# Altium PCB modFOC_ESC.PcbDoc (part 3 of 3)
Units mm, origin at the board's own origin, x right, y up, seen from the top; angles counter-clockwise.
Board outline 99.06 x 55.88 mm, 4 copper layers (Top Layer, Mid Layer 1, Mid Layer 2, Bottom Layer), stack 1.531 mm thick; 183 components, 125 nets, 799 pads, 484 vias.
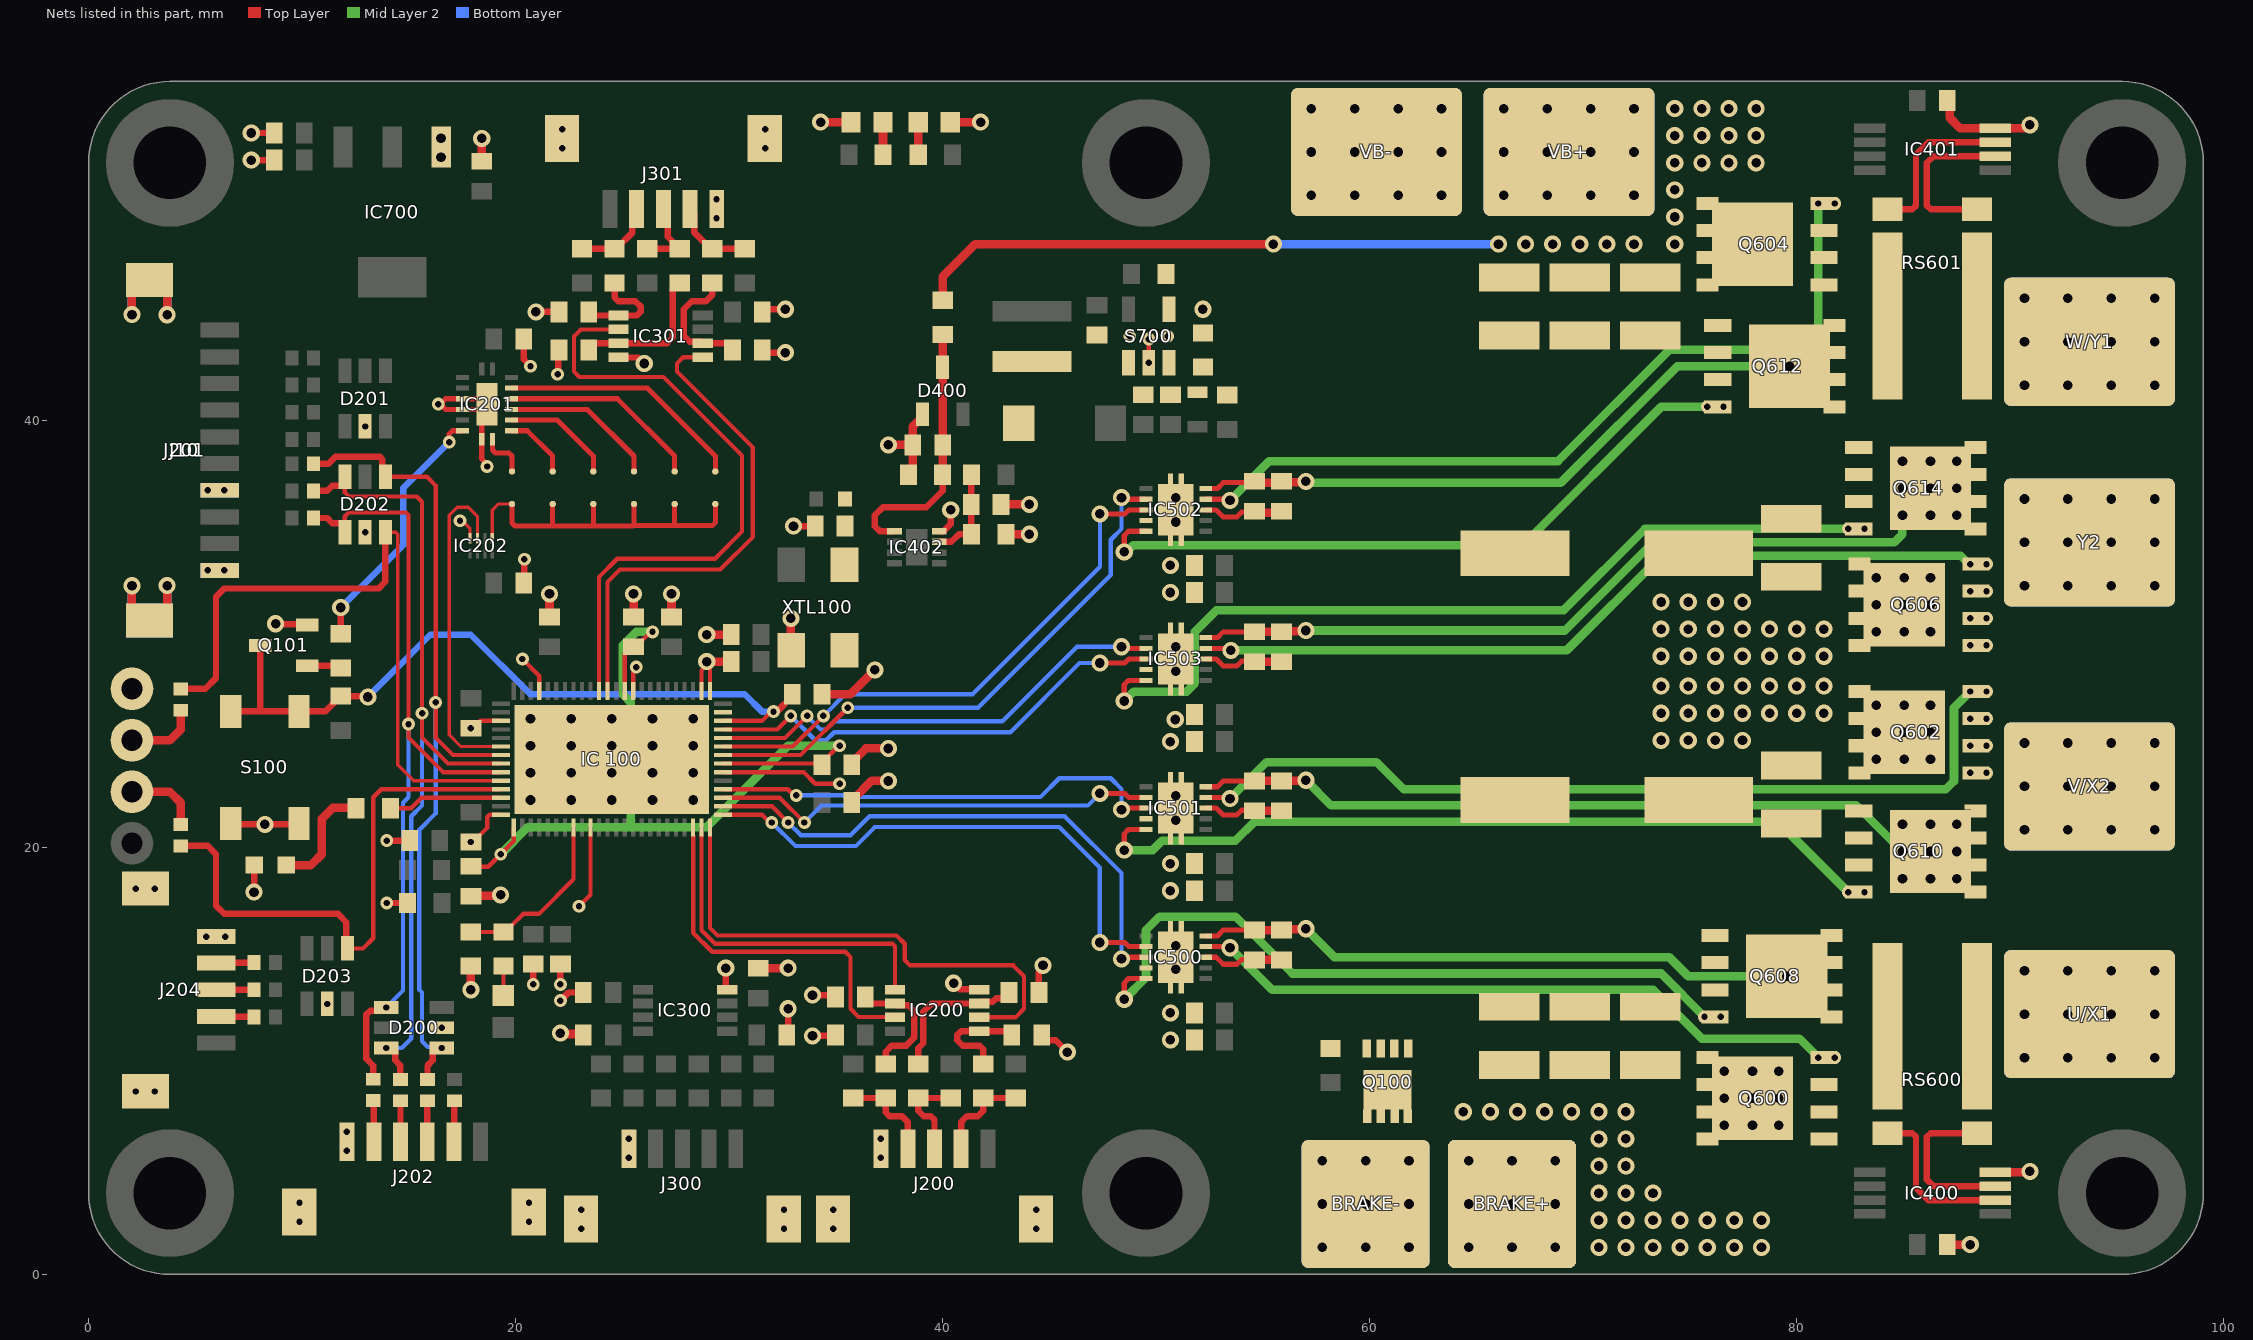
[diagram p4: the nets of this part, all layers, seen from the top]

## Via types
v1: diameter 0.8, hole 0.45, Top Layer to Bottom Layer, tented both sides, 308 vias
v2: diameter 0.6, hole 0.3, Top Layer to Bottom Layer, tented both sides, 176 vias

## Nets (pads, with @x,y where several pads share a name; then routed paths per layer and width w, separated by ;. In a path a pad name is that pad's centre, name@x,y a point inside that pad or via, vN(x,y) a via of type N, cw(c..) or ccw(c..) an arc to the next point about the centre after c; other vN are vias at no path point) (continued)
ENC2.B: "IC 100.65" IC301.5 | length 23.7
  Top Layer w0.2: 24.311,27.33 24.311,32.439 24.892,33.02 29.591,33.02 31.115,34.544 31.115,38.735 27.559,42.291 27.559,42.672 27.854,42.967 IC301.5@28.772,42.967
ENC2.N: "IC 100.66" IC301.2 | length 29.9
  Top Layer w0.2: 23.911,27.33 23.911,32.674 24.765,33.528 29.337,33.528 30.607,34.798 30.607,38.354 26.924,42.037 22.987,42.037 22.733,42.291 22.733,43.942 23.058,44.267 IC301.2@24.822,44.267
ENC2_A_5V: C307.1 IC301.1 R309.1 | length 5.1
  Top Layer w0.3: C307.1@23.368,45.185 23.368,45.085 23.536,44.917 IC301.1@24.822,44.917 25.681,44.917 25.857,45.093 25.857,45.341 25.605,45.593 24.814,45.593 24.638,45.769 R309.1@24.638,46.444
ENC2_A_IN: J301.4 R308.1 R309.2 | length 3.9
  Top Layer w0.3: R308.1@23.114,48.044 R309.2@24.638,48.044 24.713,48.044 25.474,48.805 25.474,49.705 J301.4@25.674,49.905
ENC2_B_5V: C306.1 IC301.3 R310.1 | length 6.9
  Top Layer w0.3: C306.1@23.433,43.307 23.433,43.327 23.723,43.617 IC301.3@24.822,43.617 27.107,43.617 27.361,43.871 27.361,46.194 27.611,46.444 R310.1@27.686,46.444
ENC2_B_IN: J301.3 R307.1 R310.2 | length 3.6
  Top Layer w0.3: R307.1@26.162,48.044 27.611,48.044 27.361,48.294 27.361,48.369 27.124,48.606 27.124,49.705 J301.3@26.924,49.905
ENC2_N_5V: C305.1 IC301.6 R311.1 | length 6.4
  Top Layer w0.3: R311.1@29.21,46.444 29.21,45.88 28.92,45.59 28.25,45.59 27.874,45.214 27.874,43.97 28.152,43.692 28.697,43.692 IC301.6@28.772,43.617 29.921,43.617 30.161,43.377 C305.1@30.161,43.307 ; C305.1@30.113,43.067 C305.1@30.353,43.307
ENC2_N_IN: J301.2 R306.1 R311.2 | length 3.9
  Top Layer w0.3: J301.2@28.174,49.905 28.374,49.705 28.374,48.805 29.135,48.044 R311.2@29.21,48.044 R306.1@30.734,48.044
GND: "IC 100.3" "IC 100.14" "IC 100.24" "IC 100.44" "IC 100.53" "IC 100.54" "IC 100.62" "IC 100.73" "IC 100.77" C100.1 C101.1 C102.1 C103.1 C104.1 C105.1 C106.1 C107.2 C108.1 C109.2 C110.2 C111.2 C112.2 C113.1 C200.1 C201.2 C202.2 C203.2 C204.2 C205.2 C300.1 C301.2 C302.2 C303.2 C304.1 C305.2 C306.2 C307.2 C401.1 C402.1 C404.1 C405.1 C406.1 C500.1 C501.1 C504.1 C505.1 C508.1 C509.1 C512.1 C513.1 C600.1 C602.1 C604.1 C606.1 C608.2 C609.2 C610.1 C611.1 C612.1 C613.1 C700.2 C701.2 C702.2 C708.2 C709.2 C710.2 D200.2 D201.2 D202.2 D203.2 D400.1 IC200.4 IC201.4 IC201.5 IC201.8 IC201.17 IC202.4 IC300.4 IC301.4 IC400.4 IC401.4 IC402.4 IC500.9 IC500.11 IC500.12 IC500.13 IC500.14 IC500.15 IC501.9 IC501.11 IC501.12 IC501.13 IC501.14 IC501.15 IC502.9 IC502.11 IC502.12 IC502.13 IC502.14 IC502.15 IC503.9 IC503.11 IC503.12 IC503.13 IC503.14 IC503.15 IC700.1 J10.1 J10.4 J10.MP1 J10.MP2 J200.1 J200.MP1 J200.MP2 J201.7 J201.10 J201.MP1 J201.MP2 J202.6 J202.MP1 J202.MP2 J204.1 J204.MP1 J204.MP2 J208.1 J300.1 J300.MP1 J300.MP2 J301.1 J301.MP1 J301.MP2 LED_Amber400.1 LED_Blue400.1 LED_Green400.1 Q100.1 Q100.2 Q100.3 Q101.2 Q608.1 Q608.2 Q608.3 Q610.1 Q610.2 Q610.3 Q612.1 Q612.2 Q612.3 Q614.1 Q614.2 Q614.3 R102.1 R403.1 R408.2 R410.1 R702.2 S100.1 S100.2 S700.2 VB-.1 XTL100.2 | length 115.5
  Top Layer w0.102: v1(7.747,17.907) v1@7.759,17.919
  Top Layer w0.15: v2(17.399,35.306) 17.518,35.306 17.863,34.961 IC202.4@17.863,34.486
  Top Layer w0.2: v2(17.907,20.255) 18.007,20.255 18.669,20.917 18.669,21.413 18.786,21.53 19.311,21.53 ; v2(17.907,25.589) 18.007,25.589 18.348,25.93 19.311,25.93 ; v2(20.32,28.829) 21.111,28.038 21.111,27.33 ; v2(22.97,17.246) 23.511,17.787 23.511,20.93 ; 25.511,27.33 25.511,28.197 25.654,28.34 v2(25.654,28.448) ; 28.711,27.33 28.711,28.295 28.956,28.54 v1(28.956,28.702) ; 29.111,27.33 v1@29.111,28.385 ; 29.711,23.53 33.493,23.53 34.036,22.987 v2(35.179,22.987) ; v2(49.657,42.704) v2(49.657,43.815)
  Top Layer w0.24: v2(16.383,40.767) v2@16.48,40.767 ; IC201.17@18.665,40.768 18.415,41.018 IC201.4@17.515,41.018 16.731,41.018 v2@16.48,40.767 ; v2(18.669,37.846) 18.669,37.943 18.415,38.197 IC201.8@18.415,39.118 18.415,40.518 IC201.5@17.515,40.518 16.729,40.518 v2@16.48,40.767
  Top Layer w0.3: S100.1@6.655,21.124 6.697,21.082 v1(8.255,21.082) 9.813,21.082 S100.2@9.855,21.124 ; v1(7.62,52.197) C701.2@8.698,52.197 ; v1(7.62,53.467) C700.2@8.698,53.467 ; v1@7.759,17.919 LED_Green400.1@7.759,19.177 ; v1(8.763,30.48) 8.796,30.447 10.211,30.447 Q101.2@10.244,30.414 ; v2(13.97,17.399) R410.1@14.948,17.399 ; v2(13.97,20.32) C406.1@15.048,20.32 ; C204.2@20.385,43.815 20.385,42.875 20.701,42.559 v2(20.701,42.545) ; C205.2@20.416,32.416 v2(20.416,33.497) ; v2(20.828,13.589) C106.1@20.828,14.54 ; v1(20.955,45.085) C307.2@22.033,45.085 ; v2(21.971,42.164) 22.002,42.195 22.002,43.276 C306.2@22.033,43.307 ; v2(22.098,12.827) 22.479,13.208 C301.2@23.176,13.208 ; v2(22.098,13.589) C107.2@22.098,14.54 ; IC301.4@24.822,42.967 24.837,42.952 25.747,42.952 v1(26.027,42.672) ; v1(29.845,14.351) 29.845,13.414 IC300.4@29.915,13.344 ; C305.2@31.561,43.307 31.688,43.18 v1(32.639,43.18) ; C304.1@31.561,45.085 31.688,45.212 v1(32.639,45.212) ; C303.2@32.704,11.226 32.766,11.288 v1(32.766,12.446) ; v1(33.02,35.052) C100.1@34.033,35.052 ; v1(33.909,11.176) 34.937,11.176 C200.1@34.987,11.226 ; v1(33.909,13.081) 34.91,13.081 C201.2@34.987,13.004 ; IC402.4@39.847,34.813 40.047,34.813 40.386,35.152 v1(40.386,35.814) ; v1(40.521,13.639) 40.801,13.359 41.711,13.359 IC200.4@41.726,13.344 ; C202.2@44.515,13.208 44.515,14.154 44.704,14.343 v1(44.704,14.478) ; C203.2@44.642,11.226 44.642,11.204 44.882,10.964 45.297,10.964 v1(45.847,10.414)
  Top Layer w0.4: v1(2.032,32.258) 2.032,31.233 2.632,30.633 J201.MP1@2.85,30.633 3.078,30.633 3.678,31.233 v1(3.678,32.262) ; v1(2.032,44.958) 2.032,45.983 2.632,46.583 J201.MP2@2.85,46.583 3.078,46.583 3.678,45.983 v1(3.678,44.954) ; v1(17.907,13.335) R102.1@17.907,14.44 ; C110.2@17.907,17.715 17.94,17.748 19.272,17.748 v1(19.304,17.78) ; C702.2@18.415,52.135 v1(18.415,53.213) ; C105.1@21.59,30.799 v1(21.59,31.877) ; v1(22.098,11.303) 22.136,11.265 23.137,11.265 C300.1@23.176,11.226 ; C112.2@25.527,30.799 v1(25.527,31.877) ; C104.1@27.305,30.799 v1(27.305,31.877) ; v1(28.956,28.702) C109.2@30.096,28.702 ; v1(28.956,29.972) C108.1@30.096,29.972 ; C302.2@31.369,14.339 31.375,14.345 32.76,14.345 v1(32.766,14.351) ; v1(32.893,30.734) 32.893,29.262 XTL100.2@32.913,29.242 ; v1(34.29,53.975) LED_Blue400.1@35.711,53.975 ; C113.1@34.355,27.178 35.687,27.178 v1(36.83,28.321) ; C103.1@35.752,22.098 35.752,22.198 36.686,23.132 37.447,23.132 v1(37.465,23.114) ; C111.2@35.752,23.876 35.752,23.976 36.414,24.638 v1(37.465,24.638) ; v1(37.465,38.862) C405.1@38.605,38.862 ; R408.2@38.405,37.465 38.605,37.665 C405.1@38.605,38.862 ; D400.1@39.055,40.302 39.055,40.052 38.955,39.952 38.839,39.952 38.605,39.718 C405.1@38.605,38.862 ; LED_Amber400.1@40.362,53.975 v1(41.783,53.975) ; C402.1@42.737,36.068 v1(44.069,36.068) ; R403.1@42.964,34.671 v1(44.069,34.671) ; C401.1@87.06,1.397 v1(88.138,1.397) ; C404.1@87.06,54.991 87.174,54.877 87.174,54.177 87.671,53.68 IC401.4@89.298,53.68 90.656,53.68 90.824,53.848 v1(90.932,53.848) ; IC400.4@89.298,4.785 90.891,4.785 v1(90.932,4.826)
  Bottom Layer w0.4: v1(2.032,32.258) 2.032,31.233 2.632,30.633 J10.MP2@2.85,30.633 3.078,30.633 3.678,31.233 v1(3.678,32.262) ; v1(2.032,44.958) 2.032,45.983 2.632,46.583 J10.MP1@2.85,46.583 3.078,46.583 3.678,45.983 v1(3.678,44.954)
  other v1: 50.67,10.987 50.67,12.257 50.924,14.289 50.924,15.402 50.67,17.972 50.67,19.242 50.924,21.274 20.701,22.225 22.606,22.225 24.511,22.225 26.416,22.225 28.321,22.225 50.924,22.417 20.701,23.495 22.606,23.495 24.511,23.495 26.416,23.495 28.321,23.495 20.701,24.765 22.606,24.765 24.511,24.765 26.416,24.765 28.321,24.765 50.67,24.957 50.901,25.996 20.701,26.035 22.606,26.035 24.511,26.035 26.416,26.035 28.321,26.035 50.924,28.259 50.924,29.402 50.67,31.942 50.67,33.212 50.924,35.244 50.924,36.387 52.197,45.212 16.51,52.324 16.51,53.213
  other v2: 23.076,2.141 32.576,2.141 34.887,2.141 44.387,2.141 9.878,2.464 20.628,2.464 23.076,3.03 32.576,3.03 34.887,3.03 44.387,3.03 9.878,3.353 20.628,3.353 25.3,5.466 37.111,5.466 12.102,5.789 25.3,6.355 37.111,6.355 12.102,6.678 2.218,8.572 3.107,8.572 16.54,11.557 11.176,12.67 5.518,15.822 6.407,15.822 2.218,18.072 3.107,18.072 5.588,32.983 6.35,32.983 12.954,34.768 5.588,36.733 6.35,36.733 12.954,39.721 48.768,43.942 50.546,43.942 29.411,49.473 29.411,50.362 22.187,52.748 31.687,52.748 22.187,53.637 31.687,53.637
H_BRDG_CNTRL.Gate_UX1_H: IC500.4 Q600.4 | length 31.6
  Top Layer w0.24: IC500.4@52.327,15.359 53.41,15.359 v1(53.464,15.305)
  Mid Layer 2 w0.4: v1(53.464,15.305) 55.434,13.335 73.279,13.335 75.565,11.049 80.137,11.049 v2(81.026,10.16) v2(81.788,10.16)
H_BRDG_CNTRL.Gate_UX1_L: IC500.10 Q608.4 | length 34.7
  Top Layer w0.24: v1(48.511,12.892) 48.511,13.654 48.716,13.859 IC500.10@49.527,13.859
  Mid Layer 2 w0.4: v1(48.511,12.892) 49.53,13.911 49.53,16.129 50.165,16.764 53.721,16.764 56.388,14.097 73.66,14.097 v2(75.692,12.065) v2(76.454,12.065)
H_BRDG_CNTRL.Gate_VX2_H: IC501.4 Q602.4 | length 41.7
  Top Layer w0.24: IC501.4@52.327,22.344 53.41,22.344 v1(53.464,22.29)
  Mid Layer 2 w0.4: v1(53.464,22.29) 55.177,24.003 60.325,24.003 61.595,22.733 86.995,22.733 87.376,23.114 87.376,26.543 v2(88.138,27.305) v2(88.9,27.305)
H_BRDG_CNTRL.Gate_VX2_L: IC501.10 Q610.4 | length 38.5
  Top Layer w0.24: v1(48.511,19.877) 48.511,20.639 48.716,20.844 IC501.10@49.527,20.844
  Mid Layer 2 w0.4: v1(48.511,19.877) 49.849,19.877 50.292,20.32 53.721,20.32 54.61,21.209 79.121,21.209 v2(82.423,17.907) v2(83.185,17.907)
H_BRDG_CNTRL.Gate_WY1_H: IC502.4 Q604.4 | length 39
  Top Layer w0.24: IC502.4@52.327,36.314 53.41,36.314 v1(53.464,36.26)
  Mid Layer 2 w0.4: v1(53.464,36.26) 55.304,38.1 68.834,38.1 74.041,43.307 80.518,43.307 81.026,43.815 v2(81.026,50.165) v2(81.788,50.165)
H_BRDG_CNTRL.Gate_WY1_L: IC502.10 Q612.4 | length 32.7
  Top Layer w0.24: v1(48.511,33.847) 48.511,34.609 48.716,34.814 IC502.10@49.527,34.814
  Mid Layer 2 w0.4: v1(48.511,33.847) 48.619,33.847 48.935,34.163 67.183,34.163 73.66,40.64 v2(75.819,40.64) v2(76.581,40.64)
H_BRDG_CNTRL.Gate_Y2_H: IC503.4 Q606.4 | length 38.6
  Top Layer w0.24: IC503.4@52.327,29.329 53.41,29.329 v1(53.504,29.235)
  Mid Layer 2 w0.4: v1(53.504,29.235) 69.24,29.235 73.66,33.655 87.703,33.655 88.084,33.274 v2(88.9,33.274)
  other v2: 88.138,33.274
H_BRDG_CNTRL.Gate_Y2_L: IC503.10 Q614.4 | length 41.3
  Top Layer w0.24: v1(48.511,26.862) 48.511,27.624 48.716,27.829 IC503.10@49.527,27.829
  Mid Layer 2 w0.4: v1(48.511,26.862) 48.954,27.305 51.435,27.305 51.816,27.686 51.816,30.099 52.832,31.115 69.088,31.115 72.898,34.925 v2(82.423,34.925) v2(83.185,34.925)
H_BRDG_CNTRL.Source_UX1_H: C502.1 C503.1 IC500.5 Q600.1 Q600.2 Q600.3 Q608.5 Q608.6 Q608.7 Q608.8 Q608.9 Q608.10 Q608.11 RS600.3 | length 28.3
  Top Layer w0.24: IC500.5@52.327,15.859 52.875,15.859 53.148,16.132 C503.1@54.607,16.132
  Top Layer w0.4: C503.1@54.607,16.132 C502.1@55.877,16.132 55.908,16.163 56.989,16.163 v1(57.02,16.194)
  Mid Layer 2 w0.4: v1(57.02,16.194) 58.355,14.859 74.041,14.859 74.93,13.97 v1(79.544,13.97)
H_BRDG_CNTRL.Source_VX2_H: C506.1 C507.1 IC501.5 Q602.1 Q602.2 Q602.3 Q610.5 Q610.6 Q610.7 Q610.8 Q610.9 Q610.10 Q610.11 V/X2.1 | length 34.2
  Top Layer w0.24: IC501.5@52.327,22.844 52.875,22.844 53.148,23.117 C506.1@54.607,23.117
  Top Layer w0.4: C506.1@54.607,23.117 C507.1@55.877,23.117 55.893,23.133 57.004,23.133 v1(57.02,23.149)
  Mid Layer 2 w0.4: v1(57.02,23.149) 58.198,21.971 82.804,21.971 v1(84.963,19.812) ; V/X2.1@90.6,22.86 V/X2.1@90.678,22.86
  other v1: 84.963,18.542 86.275,18.542 87.503,18.542 86.275,19.812 87.503,19.812 84.963,21.082 86.275,21.082 87.503,21.082
  other v2: 88.138,23.495 88.9,23.495 88.138,24.765 88.9,24.765 88.138,26.035 88.9,26.035
H_BRDG_CNTRL.Source_WY1_H: C510.1 C511.1 IC502.5 Q604.1 Q604.2 Q604.3 Q612.5 Q612.6 Q612.7 Q612.8 Q612.9 Q612.10 Q612.11 RS601.2 | length 29.8
  Top Layer w0.24: IC502.5@52.327,36.814 52.875,36.814 53.148,37.087 C510.1@54.607,37.087
  Top Layer w0.4: C510.1@54.607,37.087 55.877,37.087 55.908,37.118 56.989,37.118 v1(57.02,37.149)
  Mid Layer 2 w0.4: v1(57.02,37.149) 57.085,37.084 68.961,37.084 74.422,42.545 v1(79.671,42.545)
H_BRDG_CNTRL.Source_Y2_H: C514.1 C515.1 IC503.5 Q606.1 Q606.2 Q606.3 Q614.5 Q614.6 Q614.7 Q614.8 Q614.9 Q614.10 Q614.11 Y2.1 | length 35.5
  Top Layer w0.24: IC503.5@52.327,29.829 52.875,29.829 53.148,30.102 C514.1@54.607,30.102
  Top Layer w0.4: C514.1@54.607,30.102 C515.1@55.877,30.102 55.908,30.133 56.989,30.133 v1(57.02,30.164)
  Mid Layer 2 w0.4: v1(57.02,30.164) 69.153,30.164 73.279,34.29 84.582,34.29 84.963,34.671 v1(84.963,35.56)
  other v1: 86.275,35.56 87.503,35.56 84.963,36.83 86.275,36.83 87.503,36.83 84.963,38.1 86.275,38.1 87.503,38.1
  other v2: 88.138,29.464 88.9,29.464 88.138,30.734 88.9,30.734 88.138,32.004 88.9,32.004
HALL.UX: "IC 100.38" IC200.2 | length 24.6
  Top Layer w0.2: 29.111,20.93 29.111,16.228 29.464,15.875 37.846,15.875 38.227,15.494 38.227,14.732 38.481,14.478 43.307,14.478 43.815,13.97 43.815,12.446 43.413,12.044 IC200.2@41.726,12.044
HALL.V: "IC 100.37" IC200.5 | length 16.2
  Top Layer w0.2: 28.711,20.93 28.711,16.12 29.337,15.494 37.659,15.494 37.776,15.377 IC200.5@37.776,13.344
HALL.WY: "IC 100.36" IC200.7 | length 17.4
  Top Layer w0.2: 28.311,20.93 28.311,20.546 28.321,20.536 28.321,16.002 29.21,15.113 35.443,15.113 35.687,14.869 35.687,12.446 36.068,12.065 37.755,12.065 IC200.7@37.776,12.044
HALL_U_5V: C201.1 IC200.6 R205.1 | length 6
  Top Layer w0.3: C201.1@36.387,13.004 36.387,12.934 36.627,12.694 IC200.6@37.776,12.694 37.851,12.619 38.396,12.619 38.674,12.341 38.674,11.097 38.298,10.721 37.628,10.721 37.338,10.431 R205.1@37.338,9.867
HALL_U_IN: J200.2 R200.1 R205.2 | length 4.7
  Top Layer w0.3: R200.1@35.814,8.267 R205.2@37.338,8.267 37.338,7.592 37.514,7.416 38.1,7.416 38.374,7.142 J200.2@38.374,5.898
HALL_V_5V: C202.1 IC200.3 R204.1 | length 6.9
  Top Layer w0.3: R204.1@38.862,9.867 38.862,10.591 39.101,10.83 39.101,12.304 39.491,12.694 IC200.3@41.726,12.694 41.801,12.769 42.346,12.769 42.516,12.939 C202.1@43.18,12.939
HALL_V_IN: J200.3 R201.1 R204.2 | length 4.4
  Top Layer w0.3: J200.3@39.624,5.898 39.624,7.24 39.448,7.416 39.116,7.416 38.862,7.67 R204.2@38.862,8.267 R201.1@40.386,8.267
HALL_W_5V: C203.1 IC200.1 R203.1 | length 5.1
  Top Layer w0.3: R203.1@41.91,9.867 41.91,10.542 41.734,10.718 40.943,10.718 40.691,10.97 40.691,11.218 40.867,11.394 43.012,11.394 43.18,11.226 C203.1@43.18,11.126
HALL_W_IN: J200.4 R202.1 R203.2 | length 4.6
  Top Layer w0.3: J200.4@40.874,5.898 40.874,7.142 41.02,7.288 41.148,7.416 41.656,7.416 41.91,7.67 R203.2@41.91,8.267 R202.1@43.434,8.267
NetBRAKE-_1: BRAKE-.1 Q100.5 Q100.6 Q100.7 Q100.8 Q100.9
NetC100_2: C100.2 L100.2 XTL100.4
NetC402_2: C402.2 IC402.3 R401.1 R403.2 | length 4.5
  Top Layer w0.3: IC402.3@39.847,34.313 40.409,34.313 40.767,34.671 R403.2@41.364,34.671 41.35,34.685 41.35,36.054 C402.2@41.337,36.068 41.35,36.082 41.35,37.451 R401.1@41.364,37.465
NetC405_2: C405.2 D400.3 IC402.5 R407.2 R408.1 | length 12.5
  Top Layer w0.3: IC402.5@37.747,34.813 37.069,34.813 36.83,35.052 36.83,35.56 37.211,35.941 39.243,35.941 40.005,36.703 R408.1@40.005,37.465
  Top Layer w0.4: R408.1@40.005,37.465 C405.2@40.005,38.862 D400.3@40.005,42.502 R407.2@40.005,44.031
NetC502_2: C502.2 C503.2 IC500.3 | length 5.7
  Top Layer w0.24: C503.2@54.607,14.732 54.581,14.758 54.011,14.758 ; 52.815,14.859 53.143,14.531 ; 52.815,14.859 53.143,14.531 ; 52.815,14.859 IC500.3@52.327,14.859 52.815,14.859 ; 53.143,14.531 53.785,14.531 ; 53.143,14.531 53.785,14.531 ; 53.785,14.531 54.011,14.758 ; 53.785,14.531 54.011,14.758
  Top Layer w0.4: C503.2@54.607,14.732 C502.2@55.877,14.732
NetC506_2: C506.2 C507.2 IC501.3 | length 5.7
  Top Layer w0.24: C506.2@54.607,21.717 54.581,21.743 54.011,21.743 ; 52.815,21.844 IC501.3@52.327,21.844 52.815,21.844 ; 52.815,21.844 53.143,21.516 ; 52.815,21.844 53.143,21.516 ; 53.143,21.516 53.785,21.516 ; 53.143,21.516 53.785,21.516 ; 53.785,21.516 54.011,21.743 ; 53.785,21.516 54.011,21.743
  Top Layer w0.4: C506.2@54.607,21.717 C507.2@55.877,21.717
NetC510_2: C510.2 C511.2 IC502.3 | length 5.7
  Top Layer w0.24: C510.2@54.607,35.687 54.581,35.713 54.011,35.713 ; 52.815,35.814 IC502.3@52.327,35.814 52.815,35.814 ; 52.815,35.814 53.143,35.486 ; 52.815,35.814 53.143,35.486 ; 53.143,35.486 53.785,35.486 ; 53.143,35.486 53.785,35.486 ; 53.785,35.486 54.011,35.713 ; 53.785,35.486 54.011,35.713
  Top Layer w0.4: C510.2@54.607,35.687 C511.2@55.877,35.687
NetC514_2: C514.2 C515.2 IC503.3 | length 3.8
  Top Layer w0.24: IC503.3@52.327,28.829 52.815,28.829 53.143,28.501 53.785,28.501 54.011,28.728 54.581,28.728 C514.2@54.607,28.702
  Top Layer w0.4: C514.2@54.607,28.702 C515.2@55.877,28.702
NetC704_2: C704.2 R701.2 R702.1 S700.3
NetD700_2: D700.2 L700.2 S700.1
NetIC201_9: IC201.9 SB205.2 | length 2.3
  Top Layer w0.24: IC201.9@18.915,39.118 18.915,38.622 19.056,38.481 19.685,38.481 19.833,38.333 SB205.2@19.833,37.613
NetIC201_10: IC201.10 SB204.2 | length 3.1
  Top Layer w0.24: IC201.10@19.815,39.518 20.553,39.518 21.738,38.333 SB204.2@21.738,37.613
NetIC201_11: IC201.11 SB203.2 | length 5.2
  Top Layer w0.24: IC201.11@19.815,40.018 21.958,40.018 23.643,38.333 SB203.2@23.643,37.613
NetIC201_12: IC201.12 SB202.2 | length 7.4
  Top Layer w0.24: IC201.12@19.815,40.518 23.363,40.518 25.548,38.333 SB202.2@25.548,37.613
NetIC201_13: IC201.13 SB201.2 | length 9.5
  Top Layer w0.24: IC201.13@19.815,41.018 24.768,41.018 27.453,38.333 SB201.2@27.453,37.613
NetIC201_14: IC201.14 SB200.2 | length 11.6
  Top Layer w0.24: IC201.14@19.815,41.518 26.173,41.518 29.358,38.333 SB200.2@29.358,37.613
NetIC202_1: IC202.1 SB200.1 SB201.1 SB202.1 SB203.1 SB204.1 SB205.1 | length 17.9
  Top Layer w0.15: IC202.1@18.913,34.486 18.913,35.804 19.198,36.089 SB205.1@19.833,36.089
  Top Layer w0.24: SB205.1@19.833,36.089 19.833,35.193 19.974,35.052 21.717,35.052 ; SB204.1@21.738,36.089 21.738,35.073 21.717,35.052 ; SB203.1@23.643,36.089 23.643,35.073 23.622,35.052 ; SB202.1@25.548,36.089 25.548,35.073 ; SB201.1@27.453,36.089 27.453,35.073 ; SB200.1@29.358,36.089 29.358,35.214 29.217,35.073 27.453,35.073 ; 21.717,35.052 23.622,35.052 ; 23.622,35.052 25.527,35.052 25.548,35.073 ; 25.548,35.073 27.453,35.073
"NetIC 100_22": "IC 100.22" R100.1 R102.2 | length 8.2
  Top Layer w0.2: R102.2@17.907,16.04 19.506,16.04 19.806,16.34 20.357,16.891 21.091,16.891 22.711,18.511 22.711,20.93
"NetIC 100_51": "IC 100.51" XTL100.3
NetJ202_2: J202.2 R206.1 | length 1.9
  Top Layer w0.3: J202.2@17.115,6.221 17.13,6.236 17.13,8.121 R206.1@17.145,8.136
NetJ202_3: J202.3 R207.1 | length 1.9
  Top Layer w0.3: J202.3@15.865,6.221 15.87,6.226 15.87,8.131 R207.1@15.875,8.136
NetJ202_4: J202.4 R208.1 | length 1.9
  Top Layer w0.3: R208.1@14.605,8.136 14.61,8.131 14.61,6.226 J202.4@14.615,6.221
NetJ202_5: J202.5 R209.1 | length 1.9
  Top Layer w0.3: R209.1@13.335,8.144 13.35,8.129 13.35,6.236 J202.5@13.365,6.221
NetJ204_2: J204.2 R219.1 | length 1.8
  Top Layer w0.3: J204.2@5.975,14.585 5.985,14.595 7.745,14.595 R219.1@7.755,14.605
NetJ204_3: J204.3 R218.1 | length 1.8
  Top Layer w0.3: J204.3@5.975,13.335 R218.1@7.755,13.335
NetJ204_4: J204.4 R217.1 | length 1.8
  Top Layer w0.3: J204.4@5.975,12.085 5.985,12.075 7.745,12.075 R217.1@7.755,12.065
NetJ206_1: J206.1 R220.1 | length 3.4
  Top Layer w0.4: J206.1@2.032,25.019 3.81,25.019 4.318,25.527 R220.1@4.318,26.424
NetJ207_1: J207.1 R221.1 | length 3.4
  Top Layer w0.4: J207.1@2.032,22.606 3.81,22.606 4.318,22.098 R221.1@4.318,21.201
NetLED_Amber400_2: LED_Amber400.2 R404.2 | length 1.7
  Top Layer w0.3: LED_Amber400.2@38.862,53.848 38.989,53.975 LED_Amber400.2@38.862,53.975
  Top Layer w0.4: R404.2@38.862,52.451 LED_Amber400.2@38.862,53.848
NetLED_Blue400_2: LED_Blue400.2 R405.2 | length 1.5
  Top Layer w0.4: R405.2@37.211,52.451 LED_Blue400.2@37.211,53.975
NetLED_Green400_2: LED_Green400.2 R406.2 | length 5.4
  Top Layer w0.4: LED_Green400.2@9.259,19.177 10.414,19.177 10.922,19.685 10.922,21.336 11.44,21.854 12.525,21.854 R406.2@12.535,21.844
NetQ100_4: Q100.4 R101.2
NetQ101_1: Q101.1 R104.1 | length 1.6
  Top Layer w0.3: Q101.1@10.244,28.514 11.707,28.514 R104.1@11.811,28.41
NetR100_2: R100.2 RT100.2 | length 1.4
  Top Layer w0.2: RT100.2@19.431,13.069 R100.2@19.431,14.44
NetR700_1: R700.1 S700.4
NetRS600_2: RS600.2 U/X1.1
NetRS601_3: RS601.3 W/Y1.1
PWM_Out.PWM_UX1_H: "IC 100.39" IC500.7 | length 25.2
  Top Layer w0.2: 29.711,21.53 31.537,21.53 31.896,21.171 v2(32.004,21.171)
  Top Layer w0.24: v1(47.368,15.548) 48.537,15.548 48.726,15.359 IC500.7@49.527,15.359
  Bottom Layer w0.2: v2(32.004,21.171) 33.109,20.066 35.941,20.066 36.83,20.955 45.466,20.955 47.368,19.053 v1(47.368,15.548)
PWM_Out.PWM_UX1_L: "IC 100.40" IC500.8 | length 25.9
  Top Layer w0.2: 29.711,21.93 32.007,21.93 v2(32.766,21.171)
  Top Layer w0.24: v1(48.384,14.786) 48.457,14.859 IC500.8@49.527,14.859
  Bottom Layer w0.2: v2(32.766,21.171) 33.363,20.574 35.687,20.574 36.576,21.463 45.72,21.463 48.384,18.799 v1(48.384,14.786)
PWM_Out.PWM_VX2_H: "IC 100.41" IC501.7 | length 20.9
  Top Layer w0.2: 29.711,22.33 32.369,22.33 v2(33.528,21.171)
  Top Layer w0.24: v1(47.368,22.533) 48.537,22.533 48.726,22.344 IC501.7@49.527,22.344
  Bottom Layer w0.2: v2(33.528,21.171) 34.328,21.971 46.806,21.971 v1(47.368,22.533)
PWM_Out.PWM_VX2_L: "IC 100.42" IC501.8 | length 21.5
  Top Layer w0.2: 29.711,22.73 32.75,22.73 33.039,22.441 v2(33.147,22.441)
  Top Layer w0.24: v1(48.384,21.771) 48.457,21.844 IC501.8@49.527,21.844
  Bottom Layer w0.2: v2(33.147,22.441) 35.361,22.441 35.442,22.36 44.585,22.36 45.466,23.241 47.879,23.241 48.384,22.736 v1(48.384,21.771)
PWM_Out.PWM_WY1_H: "IC 100.46" IC502.7 | length 26.7
  Top Layer w0.2: 29.711,24.33 33.347,24.33 v2(35.56,26.543)
  Top Layer w0.24: v1(48.384,36.387) 48.457,36.314 IC502.7@49.527,36.314
  Bottom Layer w0.2: v2(35.56,26.543) 41.656,26.543 47.879,32.766 47.879,34.417 48.387,34.925 48.387,36.384 v1(48.384,36.387)
PWM_Out.PWM_WY1_L: "IC 100.47" IC502.8 | length 25.9
  Top Layer w0.2: 29.711,24.73 32.985,24.73 v2(34.417,26.162)
  Top Layer w0.24: v1(47.368,35.625) 48.537,35.625 48.726,35.814 IC502.8@49.527,35.814
  Bottom Layer w0.2: v2(34.417,26.162) 35.433,27.178 41.402,27.178 47.371,33.147 v1@47.371,35.625
PWM_Out.PWM_Y2_H: "IC 100.48" IC503.7 | length 22.1
  Top Layer w0.2: 29.711,25.13 32.623,25.13 v2(33.655,26.162)
  Top Layer w0.24: v1(48.384,29.402) 48.457,29.329 IC503.7@49.527,29.329
  Bottom Layer w0.2: v2(33.655,26.162) 34.29,25.527 34.544,25.527 34.925,25.908 42.799,25.908 46.293,29.402 v1(48.384,29.402)
PWM_Out.PWM_Y2_L: "IC 100.49" IC503.8 | length 22.1
  Top Layer w0.2: 29.711,25.53 32.261,25.53 v2(32.893,26.162)
  Top Layer w0.24: v1(47.368,28.64) 48.537,28.64 48.726,28.829 IC503.8@49.527,28.829
  Bottom Layer w0.2: v2(32.893,26.162) 34.036,25.019 34.544,25.019 34.925,25.4 43.18,25.4 46.42,28.64 v1(47.368,28.64)
RS1_neg: IC400.3 RS600.1 | length 7.7
  Top Layer w0.3: RS600.1@88.46,6.62 86.282,6.62 86.106,6.444 86.106,4.445 86.416,4.135 IC400.3@89.298,4.135
RS1_pos: IC400.2 RS600.4 | length 7.7
  Top Layer w0.3: RS600.4@84.26,6.62 85.422,6.62 85.598,6.444 85.598,4.064 86.177,3.485 IC400.2@89.298,3.485
RS2_neg: IC401.2 RS601.4 | length 7.7
  Top Layer w0.3: RS601.4@88.46,49.895 86.282,49.895 86.106,50.071 86.106,52.07 86.416,52.38 IC401.2@89.298,52.38
RS2_pos: IC401.3 RS601.1 | length 7.7
  Top Layer w0.3: RS601.1@84.26,49.895 85.422,49.895 85.598,50.071 85.598,52.451 86.177,53.03 IC401.3@89.298,53.03
SPI.MISO: "IC 100.9" D200.4 D202.1 R209.2 R216.1 | length 39.3
  Top Layer w0.2: D202.1@12.004,35.043 12.004,35.511 12.186,35.693 14.869,35.693 14.986,35.576 v2(14.986,25.781) 14.986,25.146 16.602,23.53 19.311,23.53 ; D200.4@13.94,12.642 D200.4@14.35,12.642
  Top Layer w0.3: R216.1@10.533,35.433 11.176,35.433 11.416,35.193 11.854,35.193 12.004,35.043 D202.1@12.004,34.768 ; R209.2@13.335,9.144 13.335,9.779 13.015,10.099 13.015,12.181 13.191,12.357 13.655,12.357 D200.4@13.94,12.642
  Bottom Layer w0.2: v2(13.94,12.507) 14.732,13.299 14.732,22.098 14.986,22.352 v2(14.986,25.781)
SPI.MOSI: "IC 100.8" D200.6 D202.6 R208.2 R215.1 | length 40.3
  Top Layer w0.2: D202.6@12.004,37.093 12.004,36.625 12.186,36.443 15.373,36.443 15.621,36.195 v2(15.621,26.289) 15.621,25.146 16.837,23.93 19.311,23.93
  Top Layer w0.24: D200.6@13.94,10.742 D200.6@14.365,10.742
  Top Layer w0.3: R215.1@10.533,36.703 11.176,36.703 11.416,36.943 11.854,36.943 12.004,37.093 D202.6@12.004,37.368 ; D200.6@14.215,10.615 14.365,10.465 14.365,10.027 14.605,9.787 R208.2@14.605,9.144
  Bottom Layer w0.2: v2(13.94,10.607) 14.671,10.607 15.113,11.049 15.113,21.463 15.621,21.971 v2(15.621,26.289)
SPI.NSCS: "IC 100.6" IC202.3 | length 15.6
  Top Layer w0.15: IC202.3@18.213,34.486 18.213,35.508 17.78,35.941 17.272,35.941 16.891,35.56 16.891,25.273 17.434,24.73 19.311,24.73
SPI.SCK: "IC 100.7" D200.1 D202.4 R207.2 R214.1 | length 41.4
  Top Layer w0.2: D202.4@13.904,37.368 15.845,37.368 16.256,36.957 v2(16.256,26.797) 16.256,25.146 17.072,24.33 19.311,24.33
  Top Layer w0.24: D200.1@16.115,10.742 D200.1@16.54,10.742
  Top Layer w0.3: R214.1@10.533,37.973 11.239,37.973 11.559,38.293 13.65,38.293 13.754,38.189 13.754,37.518 D202.4@13.904,37.368 ; R207.2@15.875,9.144 15.875,9.787 16.115,10.027 16.115,10.465 D200.1@16.265,10.615
  Bottom Layer w0.2: v2(16.256,26.797) 16.256,21.59 15.494,20.828 15.494,13.335 15.621,13.208 15.621,10.922 15.887,10.656 16.491,10.656 v2(16.54,10.607)
STATUS: "IC 100.12" R406.1 | length 5.4
  Top Layer w0.2: R406.1@14.135,21.844 15.113,21.844 15.599,22.33 19.311,22.33
TMC_NRST: "IC 100.50" C113.2 Q101.3 R103.1 S100.3 S100.4 | length 35.4
  Top Layer w0.2: 29.711,25.93 31.537,25.93 31.896,26.289 32.004,26.289 v2(32.081,26.366) ; C113.2@32.955,27.078 C113.2@32.955,27.178
  Top Layer w0.3: S100.4@6.655,26.374 S100.3@9.855,26.374 11.096,26.374 11.486,26.764 11.486,26.839 11.736,27.089 R103.1@11.811,27.089 13.043,27.089 v1(13.081,27.051) ; 8.044,26.416 Q101.3@8.044,29.464 ; v2(32.081,26.366) 32.243,26.366 C113.2@32.955,27.078
  Bottom Layer w0.3: v1(13.081,27.051) 16.002,29.972 17.907,29.972 20.701,27.178 30.734,27.178 31.546,26.366 v2(32.081,26.366)
TMC_RST: IC201.7 R104.2 | length 12.1
  Top Layer w0.24: v2(16.891,38.989) 16.891,39.37 17.039,39.518 IC201.7@17.515,39.518
  Top Layer w0.3: R104.2@11.811,30.01 v1(11.811,31.242)
  Bottom Layer w0.3: v1(11.811,31.242) 14.732,34.163 14.732,36.83 v2(16.891,38.989)
UART.RX: "IC 100.10" D202.3 R220.2 | length 32.8
  Top Layer w0.15: D202.3@13.904,34.768 14.39,34.768 14.478,34.68 14.478,23.876 15.224,23.13 19.311,23.13
  Top Layer w0.3: R220.2@4.326,27.432 5.461,27.432 5.969,27.94 5.969,31.75 6.35,32.131 13.589,32.131 13.904,32.446 D202.3@13.904,34.768
UART.TX: "IC 100.11" D203.4 R221.2 | length 26
  Top Layer w0.2: D203.4@12.126,15.27 12.857,15.27 13.335,15.748 13.335,22.352 13.713,22.73 19.311,22.73
  Top Layer w0.3: R221.2@4.318,20.074 5.58,20.074 5.969,19.685 5.969,17.272 6.35,16.891 11.684,16.891 12.075,16.5 12.075,15.321 D203.4@12.126,15.27
VB+: BRAKE+.1 C600.2 C602.2 C604.2 C606.2 C608.1 C609.1 C610.2 C611.2 C612.2 C613.2 Q600.5 Q600.6 Q600.7 Q600.8 Q600.9 Q600.10 Q600.11 Q602.5 Q602.6 Q602.7 Q602.8 Q602.9 Q602.10 Q602.11 Q604.5 Q604.6 Q604.7 Q604.8 Q604.9 Q604.10 Q604.11 Q606.5 Q606.6 Q606.7 Q606.8 Q606.9 Q606.10 Q606.11 R407.1 VB+.1 | length 27.8
  Top Layer w0.4: R407.1@40.005,45.631 40.005,46.736 41.529,48.26 v1(55.499,48.26)
  Bottom Layer w0.4: v1(55.499,48.26) v1(66.04,48.26)
  other v1: 70.739,1.27 72.009,1.27 73.279,1.27 74.549,1.27 75.819,1.27 77.089,1.27 78.359,1.27 70.739,2.54 72.009,2.54 73.279,2.54 74.549,2.54 75.819,2.54 77.089,2.54 78.359,2.54 70.739,3.81 72.009,3.81 73.279,3.81 70.739,5.08 72.009,5.08 70.739,6.35 72.009,6.35 76.624,6.985 77.936,6.985 79.164,6.985 64.389,7.62 65.659,7.62 66.929,7.62 68.199,7.62 69.469,7.62 70.739,7.62 72.009,7.62 76.624,8.255 77.936,8.255 79.164,8.255 76.624,9.525 77.936,9.525 79.164,9.525 83.736,24.13 85.048,24.13 86.276,24.13 73.66,25.019 74.93,25.019 76.2,25.019 77.47,25.019 83.736,25.4 85.048,25.4 86.276,25.4 73.66,26.289 74.93,26.289 76.2,26.289 77.47,26.289 78.74,26.289 80.01,26.289 81.28,26.289 83.736,26.67 85.048,26.67 86.276,26.67 73.66,27.559 74.93,27.559 76.2,27.559 77.47,27.559 78.74,27.559 80.01,27.559 81.28,27.559 73.66,28.956 74.93,28.956 76.2,28.956 77.47,28.956 78.74,28.956 80.01,28.956 81.28,28.956 83.736,30.099 85.048,30.099 86.276,30.099 73.66,30.226 74.93,30.226 76.2,30.226 77.47,30.226 78.74,30.226 80.01,30.226 81.28,30.226 83.736,31.369 85.048,31.369 86.276,31.369 73.66,31.496 74.93,31.496 76.2,31.496 77.47,31.496 83.736,32.639 85.048,32.639 86.276,32.639 67.31,48.26 68.58,48.26 69.85,48.26 71.12,48.26 72.39,48.26 74.295,48.26 74.295,49.53 74.295,50.8 74.295,52.07 75.565,52.07 76.835,52.07 78.105,52.07 74.295,53.34 75.565,53.34 76.835,53.34 78.105,53.34 74.295,54.61 75.565,54.61 76.835,54.61 78.105,54.61
VCORE: "IC 100.15" "IC 100.45" "IC 100.63" C110.1 C111.1 C112.1 | length 40.8
  Top Layer w0.2: C110.1@17.9,19.1 18.719,19.1 v2(19.304,19.685) 19.911,20.292 19.911,20.93 ; 25.111,27.33 25.111,29.083 25.427,29.399 C112.1@25.527,29.399 25.627,29.399 26.327,30.099 v2(26.416,30.099) ; 29.711,23.93 C111.1@34.306,23.93 ; C111.1@34.352,23.876 34.352,23.976 35.141,24.765 v2(35.179,24.765)
  Mid Layer 2 w0.4: v2(19.304,19.685) 20.574,20.955 25.4,20.955 ; v2(26.416,30.099) 25.654,30.099 25.027,29.472 25.027,27.17 25.4,26.797 25.4,20.955 ; v2(35.179,24.765) 32.766,24.765 28.956,20.955 25.4,20.955
pads on no net: "IC 100.1" "IC 100.4" "IC 100.5" "IC 100.21" "IC 100.32" "IC 100.56" "IC 100.57" "IC 100.58" "IC 100.59" "IC 100.60" "IC 100.67" "IC 100.68" "IC 100.69" "IC 100.71" "IC 100.74" "IC 100.75" "IC 100.76" IC201.15 IC400.1 IC401.1 IC402.9 IC500.2 IC501.2 IC502.2 IC503.2 XTL100.1

## Polygon pours and split planes (outlines as drawn)
"NetIC 100_51" on Top Layer "NETIC_100_51_L01_P073" (solid, pour order 73): 34.763,30.042 33.782,29.061 33.782,28.321 33.655,28.194 32.131,28.194 31.75,27.813 31.75,27.178 31.002,26.43 29.286,26.43 29.286,26.23 31.31,26.23 32.385,27.305 32.385,27.686 32.512,27.813 35.434,27.813 36.063,28.442 36.063,30.042
NetC100_2 on Top Layer "NETC100_2_L01_P072" (solid, pour order 72): 35.108,36.672 35.108,35.607 35.043,35.542 35.043,34.322 34.763,34.042 34.763,32.442 36.063,32.442 36.063,34.042 35.823,34.282 35.823,35.542 35.758,35.607 35.758,36.672
+2,5V_ref_camp on Top Layer "+2,5V_REF_CAMP_L01_P061" (solid, pour order 61): 84.16,52.155 84.16,53.255 81.449,53.255 81.28,53.086 81.28,52.324 81.449,52.155
+2,5V_ref_camp on Top Layer "+2,5V_REF_CAMP_L01_P060" (solid, pour order 60): 84.16,3.26 84.16,4.36 81.449,4.36 81.28,4.191 81.28,3.429 81.449,3.26
GND on Top Layer "GND_L01_P058" (solid, pour order 58): 50.102,13.659 50.102,13.964 49.827,14.239 49.227,14.239 49.227,14.479 49.827,14.479 50.102,14.754 50.102,16.059 50.552,16.059 50.552,16.559 50.802,16.559 50.802,16.059 51.052,16.059 51.052,16.559 51.302,16.559 51.302,16.059 51.752,16.059 51.752,13.659 51.752,12.747 52.194,12.747 52.194,10.497 50.102,10.497
GND on Top Layer "GND_L01_P057" (solid, pour order 57): 50.102,20.644 50.102,20.949 49.827,21.224 49.227,21.224 49.227,21.464 49.827,21.464 50.102,21.739 50.102,23.044 50.552,23.044 50.552,23.544 50.802,23.544 50.802,23.044 51.052,23.044 51.052,23.544 51.302,23.544 51.302,23.044 51.752,23.044 51.752,20.644 51.752,19.732 52.194,19.732 52.194,17.482 50.102,17.482
GND on Top Layer "GND_L01_P056" (solid, pour order 56): 50.102,27.629 50.102,27.934 49.827,28.209 49.227,28.209 49.227,28.449 49.827,28.449 50.102,28.724 50.102,30.029 50.552,30.029 50.552,30.529 50.802,30.529 50.802,30.029 51.052,30.029 51.052,30.529 51.302,30.529 51.302,30.029 51.752,30.029 51.752,27.629 51.752,26.717 52.194,26.717 52.194,24.467 50.102,24.467
+13V5 on Top Layer "+13V5_L01_P055" (solid, pour order 55): 52.027,13.739 52.627,13.739 52.814,13.552 52.814,10.497 54.864,10.497 54.864,13.979 52.027,13.979
+13V5 on Top Layer "+13V5_L01_P054" (solid, pour order 54): 52.027,20.724 52.627,20.724 52.814,20.537 52.814,17.482 54.864,17.482 54.864,20.964 52.027,20.964
+13V5 on Top Layer "+13V5_L01_P053" (solid, pour order 53): 52.027,27.709 52.627,27.709 52.814,27.522 52.814,24.467 54.864,24.467 54.864,27.949 52.027,27.949
+13V5 on Top Layer "+13V5_L01_P052" (solid, pour order 52): 52.027,34.694 52.627,34.694 52.814,34.507 52.814,31.452 54.864,31.452 54.864,34.934 52.027,34.934
+5 on Top Layer "+5_L01_P032" (solid, pour order 32): 49.257,47.338 49.257,44.854 49.007,44.604 48.144,44.604 47.734,45.014 46.423,45.014 46.046,44.637 42.346,44.637 42.346,47.338 48.457,47.338
GND on Top Layer "GND_L01_P048" (solid, pour order 48): 18.905,51.745 17.925,51.745 17.809,51.861 16.074,51.861 16.074,53.761 18.905,53.761
+5 on Top Layer "+5_L01_P047" (solid, pour order 47): 10.668,44.069 10.414,43.815 5.25,43.815 5.25,48.303 8.382,51.435 9.436,51.435 9.708,51.707 9.708,53.957 12.374,53.957 12.374,51.861 11.856,51.861 10.668,50.673
3V3 on Top Layer "3V3_L01_P046" (solid, pour order 46): 10.922,50.292 12.065,51.435 13.348,51.435 13.774,51.861 13.774,53.761 14.674,53.761 14.674,51.861 15.283,51.252 18.905,51.252 18.905,44.577 17.907,44.577 17.145,43.815 10.922,43.815
H_BRDG_CNTRL.Gate_UX1_H on Top Layer "H_BRDG_CNTRL.GATE_UX1_H_L01_P045" (solid, pour order 45): 80.661,10.465 82.118,10.465 82.169,10.414 82.169,9.906 82.118,9.855 80.661,9.855
H_BRDG_CNTRL.Gate_UX1_L on Top Layer "H_BRDG_CNTRL.GATE_UX1_L_L01_P044" (solid, pour order 44): 76.819,11.76 75.362,11.76 75.311,11.811 75.311,12.319 75.362,12.37 76.819,12.37
H_BRDG_CNTRL.Gate_VX2_L on Top Layer "H_BRDG_CNTRL.GATE_VX2_L_L01_P043" (solid, pour order 43): 83.55,17.602 82.093,17.602 82.042,17.653 82.042,18.161 82.093,18.212 83.55,18.212
H_BRDG_CNTRL.Gate_VX2_H on Top Layer "H_BRDG_CNTRL.GATE_VX2_H_L01_P042" (solid, pour order 42): 87.773,27.61 89.23,27.61 89.281,27.559 89.281,27.051 89.23,27 87.773,27
H_BRDG_CNTRL.Gate_Y2_H on Top Layer "H_BRDG_CNTRL.GATE_Y2_H_L01_P041" (solid, pour order 41): 87.773,33.579 89.23,33.579 89.281,33.528 89.281,33.02 89.23,32.969 87.773,32.969
H_BRDG_CNTRL.Gate_Y2_L on Top Layer "H_BRDG_CNTRL.GATE_Y2_L_L01_P040" (solid, pour order 40): 83.55,34.62 82.093,34.62 82.042,34.671 82.042,35.179 82.093,35.23 83.55,35.23
H_BRDG_CNTRL.Gate_WY1_L on Top Layer "H_BRDG_CNTRL.GATE_WY1_L_L01_P039" (solid, pour order 39): 76.946,40.335 75.489,40.335 75.438,40.386 75.438,40.894 75.489,40.945 76.946,40.945
H_BRDG_CNTRL.Gate_WY1_H on Top Layer "H_BRDG_CNTRL.GATE_WY1_H_L01_P038" (solid, pour order 38): 80.661,50.47 82.118,50.47 82.169,50.419 82.169,49.911 82.118,49.86 80.661,49.86
NetBRAKE-_1 on Top Layer "NETBRAKE-_1_L01_P037" (solid, pour order 37): 57.168,6.477 56.642,5.951 56.642,0 62.992,0 62.992,9.57 59.692,9.57 59.692,7.1 59.069,6.477
NetQ100_4 on Top Layer "NETQ100_4_L01_P036" (solid, pour order 36): 58.662,11 58.65,10.988 57.7,10.988 57.7,10.188 58.65,10.188 58.668,10.17 60.067,10.17 60.067,11
NetR700_1 on Top Layer "NETR700_1_L01_P033" (solid, pour order 33): 50.057,46.388 50.307,46.138 50.307,44.604 50.907,44.604 50.907,47.288 50.857,47.338 50.057,47.338
+13V5 on Top Layer "+13V5_L01_P031" (solid, pour order 31): 47.14,38.354 47.648,37.846 53.467,37.846 53.815,38.194 53.815,39.986 52.865,39.986 52.862,39.983 51.473,39.983 51.253,40.203 48.913,40.203 48.6,40.516 48.6,40.713 47.14,40.713
NetD700_2 on Top Layer "NETD700_2_L01_P030" (solid, pour order 30): 42.346,43.247 48.35,43.247 48.407,43.304 49.007,43.304 49.007,42.104 47.438,42.104 46.482,41.148 46.482,39.043 42.346,39.043
NetC704_2 on Top Layer "NETC704_2_L01_P029" (solid, pour order 29): 50.307,42.104 50.952,42.104 51.473,41.583 51.473,41.043 52.413,41.043 52.67,40.786 53.815,40.786 53.815,41.586 52.865,41.586 52.672,41.779 52.672,42.907 51.722,42.907 51.325,43.304 50.307,43.304
GND on Top Layer "GND_L01_P028" (solid, pour order 28): 52.672,45.499 52.451,45.72 51.943,45.72 51.722,45.499 51.722,44.507 51.609,44.394 46.754,44.394 46.754,43.561 49.1,43.561 49.357,43.304 49.357,42.047 48.913,41.603 48.913,40.823 51.163,40.823 51.163,41.603 50.183,41.603 49.957,41.829 49.957,43.304 50.214,43.561 52.672,43.561
H_BRDG_CNTRL.Source_WY1_H on Top Layer "H_BRDG_CNTRL.SOURCE_WY1_H_L01_P016" (solid, pour order 16): 80.661,49.2 82.88,49.2 83.285,48.795 84.96,48.795 84.96,40.005 77.512,40.005 77.512,44.883 80.661,44.883 80.661,46.05
VB+ on Top Layer "VB+_L01_P027" (solid, pour order 27): 63.5,0 79.841,0 79.841,10.466 76.346,10.466 63.5,10.466
VB+ on Top Layer "VB+_L01_P026" (solid, pour order 26): 79.839,50.629 79.839,55.88 65.138,55.88 65.138,45.72 79.839,45.72
VB+ on Top Layer "VB+_L01_P024" (solid, pour order 24): 86.953,29.159 86.953,33.655 77.97,33.655 77.97,34.857 72.87,34.857 72.87,21.15 77.97,21.15 77.97,22.86 86.953,22.86
GND on Top Layer "GND_L01_P022" (solid, pour order 22): 76.946,44.958 76.946,41.605 75.676,41.605 75.184,41.113 75.184,39.497 83.55,39.497 83.55,35.89 82.28,35.89 81.661,35.271 81.661,34.29 78.346,34.29 78.346,35.306 72.39,35.306 72.39,20.701 78.346,20.701 78.346,22.225 83.55,22.225 83.55,18.872 82.118,18.872 81.788,18.542 81.788,17.018 76.819,17.018 76.819,13.03 75.549,13.03 75.057,12.538 75.057,11.43 62.447,11.43 62.017,11 62.017,10.17 60.317,10.17 60.317,11 59.888,11.43 57.579,11.43 57.579,37.671 56.134,39.116 56.134,55.88 64.452,55.88 64.452,44.958
NetRS601_3 on Top Layer "NETRS601_3_L01_P021" (solid, pour order 21): 87.76,48.795 99.06,48.795 99.06,40.005 87.76,40.005
H_BRDG_CNTRL.Source_UX1_H on Top Layer "H_BRDG_CNTRL.SOURCE_UX1_H_L01_P017" (solid, pour order 17): 81.931,9.195 82.423,9.687 82.423,10.922 81.915,11.43 77.639,11.43 77.639,16.51 84.96,16.51 84.96,7.72 83.285,7.72 82.931,7.366 82.931,5.664 80.661,5.664 80.661,9.195
NetRS600_2 on Top Layer "NETRS600_2_L01_P020" (solid, pour order 20): 87.76,7.72 99.06,7.72 99.06,16.51 87.76,16.51
H_BRDG_CNTRL.Source_VX2_H on Top Layer "H_BRDG_CNTRL.SOURCE_VX2_H_L01_P019" (solid, pour order 19): 87.773,22.622 87.376,22.225 84.37,22.225 84.37,17.018 99.06,17.018 99.06,27.94 89.535,27.94 89.535,26.832 89.043,26.34 87.773,26.34
H_BRDG_CNTRL.Source_Y2_H on Top Layer "H_BRDG_CNTRL.SOURCE_Y2_H_L01_P018" (solid, pour order 18): 89.535,33.782 89.027,34.29 84.37,34.29 84.37,39.497 99.06,39.497 99.06,28.448 87.773,28.448 87.773,32.309 89.043,32.309 89.535,32.801
GND on Top Layer "GND_L01_P007" (solid, pour order 7): 50.102,34.614 50.102,34.919 49.827,35.194 49.227,35.194 49.227,35.434 49.827,35.434 50.102,35.709 50.102,37.014 50.552,37.014 50.552,37.514 50.802,37.514 50.802,37.014 51.052,37.014 51.052,37.514 51.302,37.514 51.302,37.014 51.752,37.014 51.752,34.614 51.752,33.702 52.194,33.702 52.194,31.452 50.102,31.452
GND on Mid Layer 1 "GND_L02_P034" (solid, pour order 34): 0,0 0,55.88 99.06,55.88 99.06,0 95.25,0
H_BRDG_CNTRL.Source_Y2_H on Bottom Layer "H_BRDG_CNTRL.SOURCE_Y2_H_L04_P071" (solid, pour order 71): 89.535,33.782 89.027,34.29 84.37,34.29 84.37,39.37 99.06,39.37 99.06,28.905 88.89,28.905 88.889,28.904 87.773,28.904 87.773,32.309 89.043,32.309 89.535,32.801
H_BRDG_CNTRL.Source_VX2_H on Bottom Layer "H_BRDG_CNTRL.SOURCE_VX2_H_L04_P070" (solid, pour order 70): 87.773,22.622 87.376,22.225 84.37,22.225 84.37,17.272 99.06,17.272 99.06,27.61 93.975,27.61 89.535,27.61 89.535,26.832 89.043,26.34 87.773,26.34
NetRS600_2 on Bottom Layer "NETRS600_2_L04_P068" (solid, pour order 68): 87.76,7.72 99.06,7.72 99.06,16.51 87.76,16.51
NetRS601_3 on Bottom Layer "NETRS601_3_L04_P064" (solid, pour order 64): 87.76,48.795 99.06,48.795 99.06,40.005 87.76,40.005
VB+ on Bottom Layer "VB+_L04_P059" (solid, pour order 59): 65.138,55.88 79.839,55.88 79.839,45.72 79.839,33.655 86.953,33.655 86.953,22.86 79.841,22.86 79.841,10.466 79.841,0.204 63.5,0.204 63.5,10.466 65.138,12.104
3V3 on Bottom Layer "3V3_L04_P049" (solid, pour order 49): 10.922,43.815 10.922,55.88 18.923,55.88 18.923,43.815
+5 on Mid Layer 2 "+5_L03_P050" (solid, pour order 50): 34.417,42.545 36.703,40.259 36.703,11.557 35.56,10.414 32.512,10.414 30.734,12.192 28.321,12.192 26.543,10.414 23.685,10.414 22.606,11.493 22.606,17.145 22.225,17.526 20.701,17.526 19.304,16.129 19.304,0 56.261,0 56.261,10.287 47.625,10.287 47.625,36.068 49.149,37.592 53.721,37.592 55.499,39.37 55.499,55.88 0,55.88 0,43.815 10.414,43.815 10.668,44.069 10.668,50.673 11.938,51.943 19.558,51.943 20.828,50.673 20.828,46.101 22.352,44.577 27.432,44.577 28.702,45.847 32.639,45.847 33.401,45.085 33.401,43.561
3V3 on Mid Layer 2 "3V3_L03_P051" (solid, pour order 51): 36.449,40.132 36.449,37.846 36.449,16.51 36.449,11.684 35.433,10.668 32.639,10.668 30.861,12.446 28.194,12.446 26.416,10.668 23.812,10.668 22.86,11.62 22.86,17.272 22.352,17.78 20.579,17.78 19.05,16.251 19.05,0 0,0 0,43.561 10.541,43.561 10.922,43.942 10.922,50.546 12.065,51.689 19.431,51.689 20.574,50.546 20.574,45.974 22.225,44.323 27.559,44.323 28.829,45.593 32.512,45.593 33.147,44.958 33.147,43.434

## Silkscreen, mask and mechanical layers (free items; w line width, h text height)
Board Shape:
  the board outline again, w0.254